# Altium PCB B45120517E.PcbDoc (part 1 of 2)
Units mil, origin at the board's own origin, x right, y up, seen from the top; angles counter-clockwise.
Board outline 4000 x 6000 mil, 2 copper layers (Top Layer, Bottom Layer); 156 components, 88 nets, 425 pads, 290 vias.
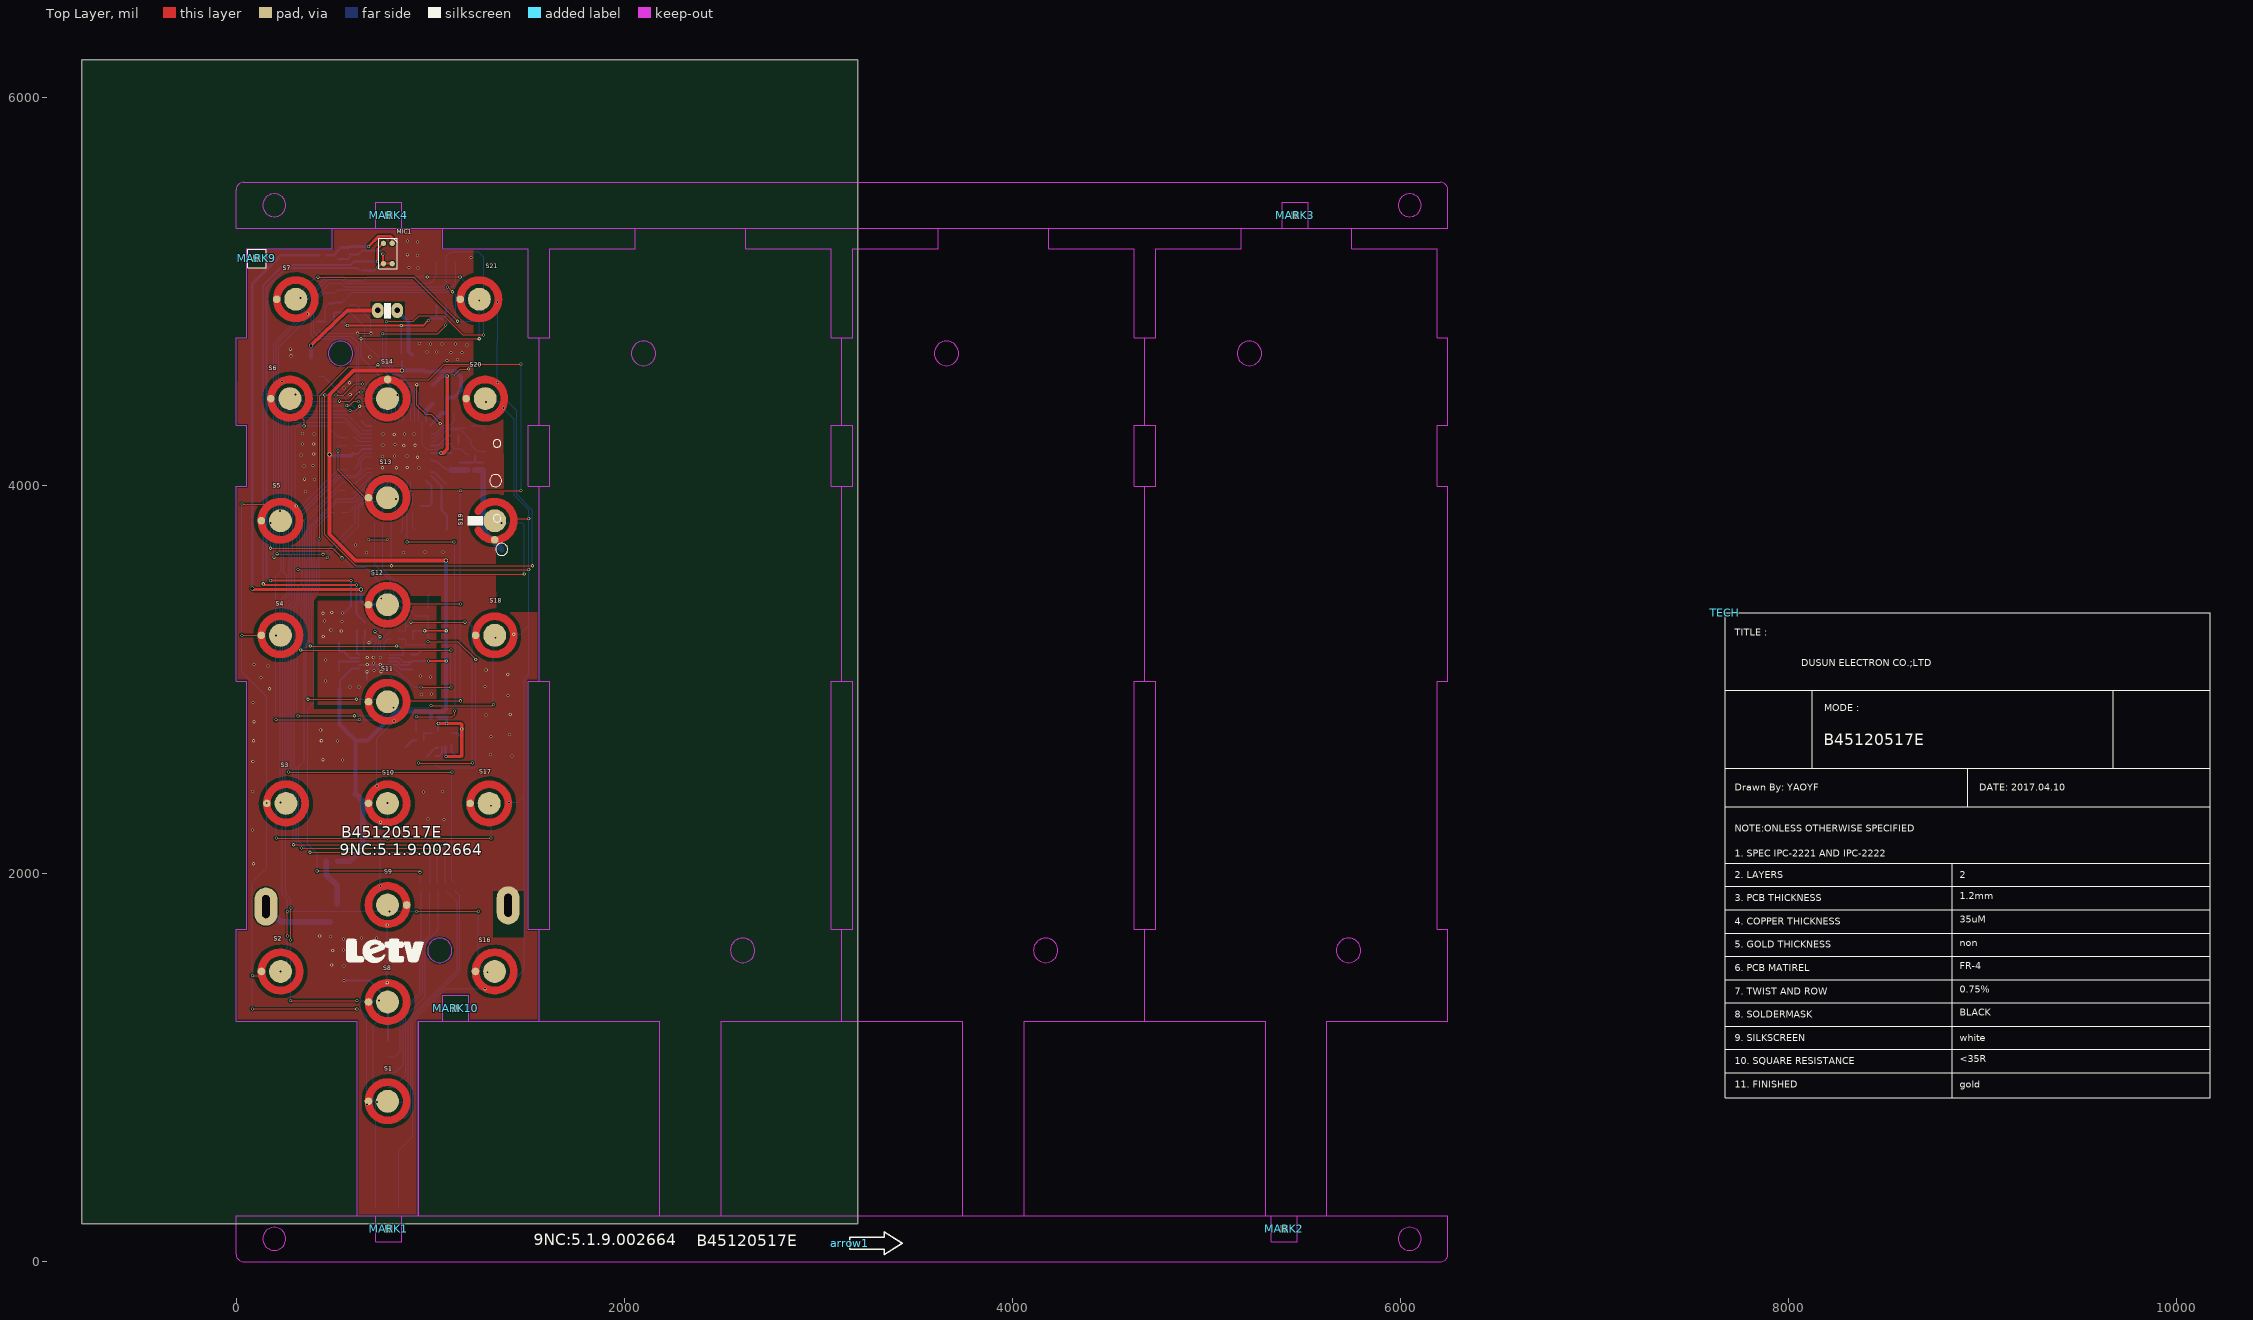
[diagram p0: Top Layer view]
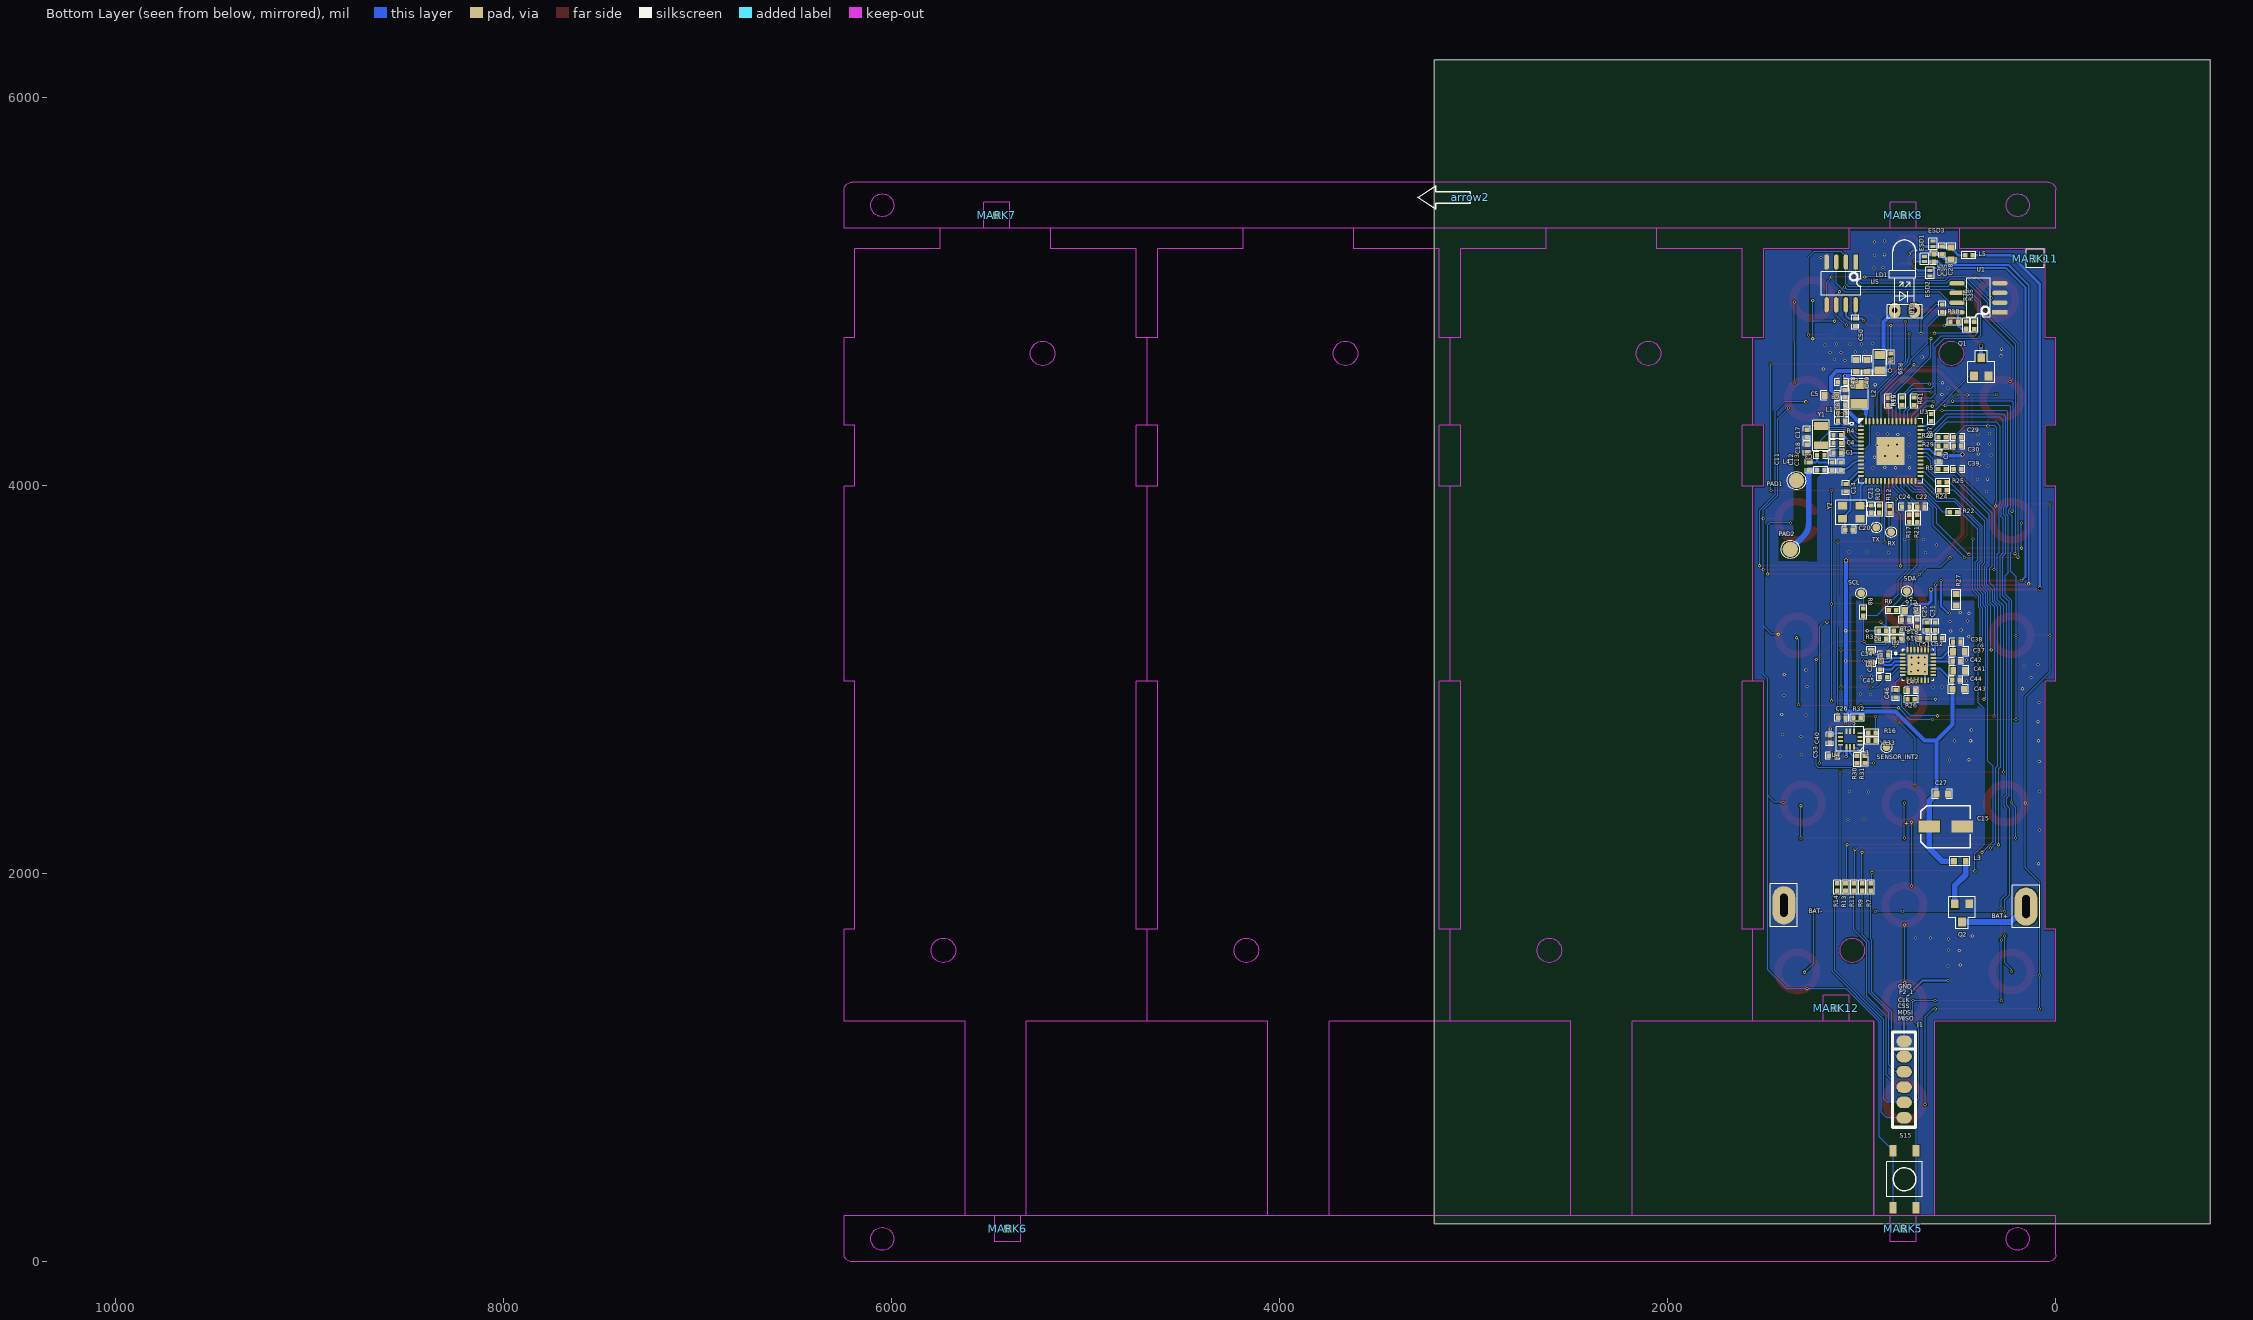
[diagram p1: Bottom Layer view, seen from below]

## Layer stack, top to bottom
Top Solder: solder mask 0.4, Solder Resist, Dk 3.5
Top Layer: signal copper 1.4
Dielectric1: core 12.6, FR-4, Dk 4.8
Bottom Layer: signal copper 1.4
Bottom Solder: solder mask 0.4, Solder Resist, Dk 3.5

## Board outline
3204.74,194.5 3204.74,6194.5 -795.26,6194.5 -795.26,194.5

## Design rules (kind name [scope] priority, off if disabled: settings)
Clearance [All] p1: gap=6 ignorepadtopadclearanceinfootprint=FALSE
ComponentClearance [All] p1: gap=0 collisioncheckmode=3 verticalgap=0 showdistances=FALSE
FabricationTestPointUsage TestPointUsage [All] p1: valid=0 allowmultiple=FALSE
FabricationTestpoint Testpoint [All] p1: side=3 testpointundercomponent=TRUE minsize=40 maxsize=100 preferedsize=60 minholesize=0 maxholesize=40 preferedholesize=32 testpointgrid=1 allowsidetop=TRUE allowsidebottom=TRUE usegrid=TRUE gridtolerance=0.01
HoleSize [All] p1: absolutevalues=TRUE maxlimit=500 minlimit=1 maxpercent=80.000 minpercent=20.000
HoleToHoleClearance [All] p1: gap=6 allowstackedmicrovias=TRUE
MinimumSolderMaskSliver [All] p1: minsoldermaskwidth=0
NetAntennae [All] p1: netantennaetolerance=10000
PolygonConnect [All] p1: connectstyle=Direct reliefconductorwidth=10 reliefentries=4 polygonreliefangle="90 Angle" airgapwidth=10
RoutingVias [All] p1: holewidth=10 width=16 viastyle="Through Hole" minholewidth=10 minwidth=16 maxholewidth=16 maxwidth=100
ShortCircuit [All] p1: allowed=TRUE
SilkToSilkClearance [All] p1: silktosilkclearance=0
SilkToSolderMaskClearance SilkscreenOverComponentPads [IsPad] p1: minsilkscreentomaskgap=2 clearancetoexposedcopper=TRUE
SolderMaskExpansion [All] p1: expansion=4
Width [All] p1: maxlimit=100 minlimit=6 preferedwidth=6
20 further rules are at their usual default settings.

## Classes and differential pairs
component class DSR-0609-ES8218-0410: ANT1 BAT+ BAT- C0 C1 C2 C3 C4 C5 C6 C7 C8 C9 C10 C11 C12 C13 C14 C15 C16 C17 C18 C19 C20 C21 C22 C24 C25 C26 C27 C28 C29 C30 C31 C32 C33 C34 C35 C36 C37 C38 C39 C40 C41 C42 C43 C44 C45 C46 C47 C48 C49 C51 C52 C53 ESD1 ESD2 ESD3 J1 L1 L2 L3 L4 L5 LD1 MIC1 PAD1 PAD2 Q1 Q2 R1 R2 R3 R4 R5 R6 R7 R8 R9 R10 R11 R12 R13 R14 R15 R16 R17 R18 R19 R20 R21 R22 R24 R25 R26 R27 R28 R29 R30 R31 R32 R33 R35 R36 R37 R38 R39 R40 R41 RX S1 S2 S3 S4 S5 S6 S7 S8 S9 S10 S11 S12 S13 S14 S15 S16 S17 S18 S19 S20 S21 SCL SDA SENSOR_INT2 TX U1 U2 U3 U5 Y1 Y2

## Components (designator, comment, footprint, x,y, rotation, side; value= is the part's Value field where it differs from the comment)
arrow1 "Comment" 1-ARROW 3163.19,95 r0 top
arrow2 "Comment" 1-ARROW 3018.19,5485 r0 bottom
BAT+ "TAP" BAT 153.65,1830.34 r270 bottom locked
BAT- "TAP" BAT 1402,1837 r270 bottom locked
C1 "0.47uF" C-0402 1127,4170 r0 bottom
C2 "2.2uF" C-0402 1105,4533 r0 bottom
C3 "0.15uF" C-0402 1212,4157 r0 bottom
C4 "0.47uF" C-0402 1127,4218 r0 bottom
C5 "10uF" C-0603 1162,4464 r0 bottom
C6 "2.2uF" C-0402 1087,4474 r90 bottom
C7 "33pF/NC" C-0402 1104,4333 r180 bottom
C8 "47nF" C-0402 1105,4416 r0 bottom
C9 "47nF" C-0402 603,4145 r270 bottom
C10 "1nF" C-0402 586,4914 r90 bottom
C11 "NC" C-0402 1272.81,4100 r90 bottom
C12 "NC" C-0402 1152,4100 r90 bottom
C13 "0.5pf" C-0402 1109,4100 r90 bottom
C14 "0.47uF" C-0402 1082,3989 r270 bottom
C15 "贴片铝电解电容100uF/10V,∮5*5.3,立隆,85C,VE" CAP_ALUM-C 568.19,2243 r180 bottom
C16 "10uF" C-0603 747,3357 r180 bottom
C17 "22pF" C-0402 1283,4269 r270 bottom
C18 "22pF" C-0402 1283,4192 r90 bottom
C19 "0.1uF" C-0402 775,3309 r180 bottom
C20 "15pF" C-0402 1066.19,3772 r180 bottom
C21 "8.2pF" C-0402 952,3879 r270 bottom
C22 "100pF/NC" C-0402 696,3890 r0 bottom
C24 "100pF/NC" C-0402 774,3891 r180 bottom
C25 "1uF" C-0402 665,3275 r270 bottom
C26 "0.1uF/50V/NC" C-0402 1103.19,2804 r0 bottom
C27 "0.1uF" C-0603 586,2411 r180 bottom
C28 "10uF/NC" C-0603 541,5197 r270 bottom
C29 "NC" C-0402 507,4249 r180 bottom
C30 "NC" C-0402 507,4205 r180 bottom
C31 "1uF" C-0402 622,3275 r270 bottom
C32 "10uF" C-0603 952,3118 r90 bottom
C33 "0.1uF" C-0402 906,3071 r270 bottom
C34 "30pF" C-0402 883,3129 r180 bottom
C35 "0.1uF" C-0402 587,5213 r270 bottom
C36 "15pF" C-0402 630,5173 r90 bottom
C37 "10uF" C-0603 500,3145 r180 bottom
C38 "0.1uF" C-0402 511,3195 r180 bottom
C39 "NC" c-0402 507,4084 r180 bottom
C40 "0.1uF/50V/NC" C-0402 1166,2694 r270 bottom
C41 "10uF" C-0603 499,3047 r180 bottom
C42 "0.1uF" C-0402 513,3096 r180 bottom
C43 "10uF" C-0603 503,2950 r180 bottom
C44 "0.1uF" C-0402 515,2999 r180 bottom
C45 "30pF" C-0402 888,3012 r0 bottom
C46 "30pF" C-0402 825,2927 r270 bottom
C47 "30pF" C-0402 745,2944 r180 bottom
C48 "10uF" C-0603 1029,4617 r90 bottom
C49 "1uF" C-0603 974,4617 r90 bottom
C50 "1uF/NC" C-0402 1033,4842 r270 bottom
C51 "12pF/NC" C-0402 683,3214 r180 bottom
C52 "12pF/NC" C-0402 604,3214 r180 bottom
C53 "0.1uF/50V/NC" C-0402 1151,2607 r0 bottom
ESD1 "PESD5V0F1BL/NC" SOD882 677,5168 r90 bottom
ESD2 "PESD5V0F1BL/NC" SOD882 649,5095 r270 bottom
ESD3 "PESD5V0F1BL/NC" SOD882 633,5246 r90 bottom
J1 "HEADER-6" PH-1*6-2.0 782,939.37 r270 bottom
L1 "MMZ1005Y152C" R-0402 1104,4374 r0 bottom
L2 "4.7uH" R-1008 1015,4472 r90 bottom
L3 "BLM18AG601SN1D" R-0603 495,2064 r180 bottom
L4 "0R" R-0402 1212,4080 r180 bottom
L5 "BLM15HG102SN1D" R-0402 448,5187 r0 bottom
LD1 "LR" IR-4.2-3 780,4903 r180 bottom locked
MARK1 "MARK" MARK-3.0#1 787.4,169.33 r90 top (schematic designator MARK4)
MARK2 "MARK" MARK-3.0#1 5402.83,169.09 r90 top (schematic designator MARK4)
MARK3 "MARK" MARK-3.0#1 5457.95,5393.66 r270 top (schematic designator MARK4)
MARK4 "MARK" MARK-3.0#1 787.4,5393.66 r270 top
MARK5 "MARK" MARK-3.0#2 787.4,169.33 r180 bottom (schematic designator MARK4)
MARK6 "MARK" MARK-3.0#2 5402.83,169.09 r0 bottom (schematic designator MARK4)
MARK7 "MARK" MARK-3.0#2 5457.95,5393.66 r0 bottom (schematic designator MARK4)
MARK8 "MARK" MARK-3.0#2 787.4,5393.66 r180 bottom (schematic designator MARK4)
MARK9 "Comment" Mark-2.0-TOP 107,5171 r180 top
MARK10 "MARK" MARK-3.0#1 1132.24,1307.09 r180 top (schematic designator MARK4)
MARK11 "Comment" Mark-2.0-TOP 106,5170 r0 bottom
MARK12 "MARK" MARK-3.0#2 1132,1307 r90 bottom (schematic designator MARK4)
MIC1 "MSM42A3722H8" MSM42A3722H8 782,5196 r0 top
PAD1 "TAP" TS-1.0#1 1337.35,4025.6 r180 bottom locked
PAD2 "TAP" TS-1.0#1 1368.79,3671.31 r180 bottom
Q1 "S8050LT1" SOT-23#1 385,4612 r90 bottom
Q2 "DMP2305U" SOT-23#2 484,1798 r270 bottom
R1 "2R" R-0805 908,4633 r270 bottom
R2 "1.5K" R-0402 894,3252 r180 bottom
R3 "1.5K" R-0402 894,3211 r180 bottom
R4 "0R" R-0402 1127,4259 r180 bottom
R5 "100R" R-0402 587,4084 r180 bottom
R6 "33R" R-0402 842,3357 r0 bottom
R7 "33R" R-0402 955,1931 r90 bottom
R8 "33R" R-0402 993,3348 r270 bottom
R9 "33R" R-0402 998,1931 r90 bottom
R10 "33R" R-0402 911,3879 r270 bottom
R11 "33R" R-0402 1041,1931 r90 bottom
R12 "33R" R-0402 857,3876 r270 bottom
R13 "33R" R-0402 1084,1931 r90 bottom
R14 "33R" R-0402 1127,1931 r90 bottom
R15 "47K" R-0402 863,4434 r90 bottom
R16 "0R/NC" R-0402 948,2727 r0 bottom
R17 "33R" R-0402 756,3831 r90 bottom
R18 "100R" R-0402 817,3252 r0 bottom
R19 "100R" R-0402 817,3211 r0 bottom
R20 "10k" R-0402 715,3291 r90 bottom
R21 "33R" R-0402 715,3831 r90 bottom
R22 "33R" R-0402 528,3863 r0 bottom
R24 "33R" R-0402 582,3976 r0 bottom
R25 "33R" R-0402 582,4017 r0 bottom
R26 "33R" R-0402 746,2899 r180 bottom
R27 "0R" R-0603 514,3412 r90 bottom
R28 "100R" R-0402 586,4250 r180 bottom
R29 "100R" R-0402 586,4205 r180 bottom
R30 "33R/NC" R-0402 1025,2588 r270 bottom
R31 "33R/NC" R-0402 984,2589 r270 bottom
R32 "0R/NC" R-0402 1024.19,2804 r180 bottom
R33 "33R/NC" R-0402 948,2686 r0 bottom
R35 "0R/NC" R-0402 420,4826 r90 bottom
R36 "0R" R-0402 462,4827 r90 bottom
R37 "1K" R-0402 643,4350 r270 bottom
R38 "0R/NC" R-0402 524,4844 r0 bottom
R39 "NC" R-0402 851,4662 r270 bottom
R40 "0R/NC" R-0402 793,4435 r90 bottom
R41 "0R/NC" R-0402 731,4435 r90 bottom
RX "TAP" TS-1.0#2 849,3760 r0 bottom
S1 "SW-PB" "K MAT D5"#1 780.79,826.77 r0 top
S2 "SW-PB" "K MAT D5"#2 229,1496.06 r0 top locked
S3 "SW-PB" "K MAT D5"#1 257.04,2362.2 r0 top locked
S4 "SW-PB" "K MAT D5"#1 228.41,3228.35 r0 top locked
S5 "SW-PB" "K MAT D5"#1 228.41,3818.9 r0 top locked
S6 "SW-PB" "K MAT D5"#3 277.3,4448.32 r0 top locked
S7 "SW-PB" "K MAT D5"#1 307.74,4960.63 r0 top locked
S8 "SW-PB" "K MAT D5"#1 780.66,1338.58 r0 top
S9 "SW-PB" "K MAT D5"#1 780.66,1838.58 r180 top
S10 "SW-PB" "K MAT D5"#1 780.66,2362.2 r0 top
S11 "SW-PB" "K MAT D5"#3 780.66,2885.83 r0 top
S12 "SW-PB" "K MAT D5"#1 780.66,3386.11 r0 top
S13 "SW-PB" "K MAT D5"#3 780.66,3937.29 r0 top locked
S14 "SW-PB" "K MAT D5"#3 780.66,4448.32 r270 top
S15 "SW-PB" KG4.5*4.5-SMD-1 780,425 r90 bottom
S16 "SW-PB" "K MAT D5"#1 1332.32,1496.06 r0 top locked
S17 "SW-PB" "K MAT D5"#1 1304.28,2362.2 r0 top locked
S18 "SW-PB" "K MAT D5"#1 1332.91,3228.35 r0 top locked
S19 "SW-PB" "K MAT D5"#4 1332.91,3818.9 r90 top
S20 "SW-PB" "K MAT D5"#1 1284.01,4448.32 r0 top locked
S21 "SW-PB" "K MAT D5"#1 1253.58,4960.63 r0 top locked
SCL "TAP" TS-1.0#2 1004,3445 r270 bottom
SDA "TAP" TS-1.0#2 768,3456 r270 bottom
SENSOR_INT2 "13" TS-1.0#2 873,2651 r180 bottom
TECH "Comment" "PCB technical" 7674.19,3344 r0 top
TX "TAP" TS-1.0#2 926,3784 r0 bottom
U1 "FM24C1024A" SOP08-6.0-1.27 399,4968 r90 bottom
U2 "ES8218" QFN-28-4*4-1 711,3076 r270 bottom
U3 "CSR1011" QFN-56-8*8 851.45,4177.17 r270 bottom
U4 "BMI160/NC" LGA-14 1060.19,2694 r0 bottom
U5 "AT25F1024B/NC" SOP08-6.0-1.27 1107,5042 r0 bottom
Y1 "32.768KHz,12.5pF" 32.768Khz-3215 1211,4258 r270 bottom
Y2 "16MHz,9pF" XD3225-1-12M-125M 1055,3862 r180 bottom

## Footprints (in the part's own frame and the unit in brackets; to place one, negate y for a bottom-side part, rotate by r counter-clockwise, add the part's x,y. Pads: shape width x height; smd on the part's side, far side on the other; paste and mask are expansions set on the pad)
1-ARROW [mil]
  silkscreen extent 0,-60 270,60
32.768Khz-3215 [mm]
  rect 1x1.8 smd: 1(-1.25,0) 2(1.25,0)
  silkscreen extent -2,-1.1 2,1.1
BAT [mm]
  oval 5x3 hole 1 slot 3 at 0 deg: 1(0,0)
  silkscreen extent -2.79,-1.78 2.79,1.78
C-0402 [mil]
  rect 22x24 smd: 1(-19,0) 2(19,0)
  silkscreen extent -36,-18 36,18
c-0402 [mil]
  rect 22x24 smd: 1(-19,0) 2(19,0)
  silkscreen extent -36,-18 36,18
C-0603 [mil]
  rect 30x35 smd: 1(-30,0) 2(30,0)
  silkscreen extent -51,-24 51,24
CAP_ALUM-C [mm]
  rect 2.8x1.6 smd: 1(-2.15,0) 2(2.15,0)
  silkscreen extent -3.25,-2.75 3.25,2.75
IR-4.2-3 [mm]
  oval 1.524x2 hole 0.7: 1(-1.27,0) 2(1.27,0)
  silkscreen extent -2.27,-1.04 2.29,9.22
"K MAT D5"#1 [mm]
  round 3 smd: 1(0,0)
  round 1 smd: 2(-2.5,0)
  Top Layer lines w1: -2.5,0 cw(c0,0) 2.5,0 cw(c0,0) -2.5,0
"K MAT D5"#2 [mm]
  round 3 smd: 1(0,0)
  round 1 smd: 2(-2.5,0)
  Top Layer lines w1: -2.5,0 ccw(c0,0) -2.427,-0.602 ccw(c0,0) 2.489,-0.236 ccw(c0,0) 2.5,0 ccw(c0,0) 2.489,0.236 ccw(c0,0) -2.5,0
"K MAT D5"#3 [mm]
  round 3 smd: 1(0,0)
  round 1 smd: 2(-2.5,0)
  Top Layer lines w1: -2.5,0 ccw(c0,0) 1.205,-2.19 ccw(c0,0) 2.5,0 ccw(c0,0) -2.5,0
"K MAT D5"#4 [mm]
  round 3 smd: 1(0,0)
  round 1 smd: 2(-2.5,0)
  Top Layer lines w1: -1.25,2.165 ccw(c0,0) -1.007,-2.288 ccw(c0,0) -0.78,-2.375 ccw(c0,0) 0.342,-2.476 ccw(c0,0) 1.25,2.165
KG4.5*4.5-SMD-1 [mm]
  rect 1.5x0.9 smd: 1(-3.75,-1.5) 1(3.75,-1.5) 2(-3.75,1.5) 2(3.75,1.5)
  silkscreen extent -2.3,-2.3 2.3,2.3
LGA-14 [mm]
  rect 0.675x0.25 smd: 1(-1.263,0.75) 2(-1.263,0.25) 3(-1.263,-0.25) 4(-1.263,-0.75) 8(1.263,-0.75) 9(1.263,-0.25) 10(1.263,0.25) 11(1.263,0.75)
  rect 0.25x0.675 smd: 5(-0.5,-1.013) 6(0,-1.013) 7(0.5,-1.013) 12(0.5,1.013) 13(0,1.013) 14(-0.5,1.013)
  silkscreen extent -1.8,-1.6 1.8,1.6
Mark-2.0-TOP [mm]
  rect 1x1 smd mask+0.5: 1(0,0)
  Top Layer pour cut-out: -1.2,1.2 -1.2,-1.2 1.2,-1.2 1.2,1.2
  Top Overlay keep-out lines w0.127: 1.2,1.2 -1.2,1.2 -1.2,-1.2 1.2,-1.2 1.2,1.2
  silkscreen extent -1.2,-1.2 1.2,1.2
MARK-3.0#1 [mm]
  rect 1x1 smd: 1(0,0)
  rect 2.5x2.5 on Top Solder: 4(0,0)
  Keep-Out Layer lines w0.127: -1.7,1.7 1.7,1.7 1.7,-1.7 -1.7,-1.7 -1.7,1.7
MARK-3.0#2 [mm]
  rect 1x1 smd: 1(0,0)
  rect 2.5x2.5 on Bottom Solder: 4(0,0)
  Keep-Out Layer lines w0.127: 1.7,-1.7 1.7,1.7 -1.7,1.7 -1.7,-1.7 1.7,-1.7
MSM42A3722H8 [mm]
  round 0.7 smd: 1(0.575,1.33) 2(0.575,-1.33) 3(-0.575,-1.33) 4(-0.575,1.33)
  silkscreen extent -1.2,-2 1.2,2
"PCB technical" [mil]
  silkscreen extent 0,-2500 2500,0
PH-1*6-2.0 [mm]
  oval 1.524x2 smd: 1(-5,0) 2(-3,0) 3(-1,0) 4(1,0) 5(3,0) 6(5,0)
  silkscreen extent -6.21,-1.5 6.26,1.5
QFN-28-4*4-1 [mm]
  rect 0.25x0.7 smd: 1(-1.35,-2) 2(-0.9,-2) 3(-0.45,-2) 4(0,-2) 5(0.45,-2) 6(0.9,-2) 7(1.35,-2) 15(1.35,2) 16(0.9,2) 17(0.45,2) 18(0,2) 19(-0.45,2) 20(-0.9,2) 21(-1.35,2)
  rect 0.7x0.25 smd: 8(2,-1.35) 9(2,-0.9) 10(2,-0.45) 11(2,0) 12(2,0.45) 13(2,0.9) 14(2,1.35) 22(-2,1.35) 23(-2,0.9) 24(-2,0.45) 25(-2,0) 26(-2,-0.45) 27(-2,-0.9) 28(-2,-1.35)
  rect 2.7x2.7 smd: 29(0,0)
  silkscreen extent -2.05,-3.03 2.05,2.05
QFN-56-8*8 [mm]
  rect 0.4x0.15 on Bottom Overlay: 0(-4.597,-2.743) 0(-4.597,-0.254) 0(-4.597,2.26) 0(4.598,-3.251) 0(4.598,-0.737) 0(4.598,1.752)
  rect 0.15x0.4 on Bottom Overlay: 0(-2.285,4.623) 0(-1.269,-4.623) 0(0.229,4.623) 0(1.22,-4.623) 0(2.719,4.623)
  rect 3.67x3.67 smd: 0(-0.025,0)
  oval 0.25x0.8 smd: 1(-3.275,-3.9) 2(-2.775,-3.9) 3(-2.275,-3.9) 4(-1.775,-3.9) 5(-1.275,-3.9) 6(-0.775,-3.9) 7(-0.275,-3.9) 8(0.225,-3.9) 9(0.725,-3.9) 10(1.22,-3.886) 11(1.725,-3.9) 12(2.225,-3.9) 13(2.725,-3.9) 14(3.225,-3.9) 29(3.225,3.9) 30(2.725,3.9) 31(2.225,3.9) 32(1.725,3.9) 33(1.225,3.9) 34(0.725,3.9) 35(0.225,3.9) 36(-0.275,3.9) 37(-0.775,3.9) 38(-1.275,3.9) 39(-1.775,3.9) 40(-2.275,3.9) 41(-2.775,3.9) 42(-3.275,3.9)
  oval 0.8x0.25 smd: 15(3.875,-3.25) 16(3.875,-2.75) 17(3.875,-2.25) 18(3.875,-1.75) 19(3.875,-1.25) 20(3.875,-0.75) 21(3.875,-0.25) 22(3.875,0.25) 23(3.875,0.75) 24(3.875,1.25) 25(3.875,1.75) 26(3.875,2.25) 27(3.875,2.75) 28(3.875,3.25) 43(-3.925,3.25) 44(-3.925,2.75) 45(-3.925,2.25) 46(-3.925,1.75) 47(-3.925,1.25) 48(-3.925,0.75) 49(-3.925,0.25) 50(-3.925,-0.25) 51(-3.925,-0.75) 52(-3.925,-1.25) 53(-3.925,-1.75) 54(-3.925,-2.25) 55(-3.925,-2.75) 56(-3.925,-3.25)
  silkscreen extent -4.3,-5.34 4.19,4.19
R-0402 [mil]
  rect 22x24 smd: 1(-19,0) 2(19,0)
  silkscreen extent -36,-18 36,18
R-0603 [mil]
  rect 30x35 smd: 1(-30,0) 2(30,0)
  silkscreen extent -51,-24 51,24
R-0805 [mil]
  rect 40x56 smd: 1(-40,0) 2(40,0)
  silkscreen extent -66,-34 66,34
R-1008 [mm]
  rect 1.2x2.2 smd: 1(-1.25,0) 2(1.25,0)
  silkscreen extent -2.01,-1.24 2,1.24
SOD882 [mm]
  rect 0.4x0.7 smd: 1(-0.35,0) 2(0.35,0)
  silkscreen extent -0.75,-0.55 0.75,0.55
SOP08-6.0-1.27 [mm]
  rect 0.6x2 smd: 1(-1.905,-2.8)
  oval 0.6x2 smd: 2(-0.635,-2.8) 3(0.635,-2.8) 4(1.905,-2.8) 5(1.905,2.8) 6(0.635,2.8) 7(-0.635,2.8) 8(-1.905,2.8)
  silkscreen extent -2.54,-1.53 2.57,1.52
SOT-23#1 [mil]
  rect 45x40 smd: 1(-47.24,37.4) 2(-47.24,-37.4) 3(47.24,0)
  silkscreen extent -83,-69 83,69
SOT-23#2 [mil]
  rect 45x40 smd: 1(-47.24,-37.4) 2(-47.24,37.4) 3(47.24,0)
  silkscreen extent -83,-69 83,69
TS-1.0#1 [mm]
  round 2 smd: 1(0,0)
  silkscreen extent -1.2,-1.2 1.2,1.2
TS-1.0#2 [mm]
  round 1 smd: 1(0,0)
  silkscreen extent -0.7,-0.7 0.7,0.7
XD3225-1-12M-125M [mm]
  rect 1.2x1 smd: 1(-1.15,-0.85) 2(1.15,0.85) 3(-1.15,0.85) 3(1.15,-0.85)
  silkscreen extent -2.04,-1.6 2.02,1.6

## Part data
C1 C2 C3 C4 C5 C6 C7 C8 C9 C10 C11 C12 C13 C14 C16 C17 C18 C19 C20 C21 C25 C28 C29 C30 C31 C32 C33 C34 C35 C36 C37 C38 C39 C41 C42 C43 C44 C45 C46 C47 C48 C49 C50 C51 C52: library part CAP, "Capacitor"
C15 C27: library part C_Dup1
C22 C24: library part CAP
C26 C40 C53: library part Cap, "capacitor 27 pF NPO , +/- 2 %, SMD case 0603"
ESD1 ESD2 ESD3: library part ESD
J1: library part HEADER-5
L1 L5: library part "INDUCTOR IRON"
L2 L4: library part INDUCTOR
L3: library part Inductance
LD1: library part LED
Q1: library part NPN, "NPN型晶体管"
Q2: library part "MOSFET P"
R1 R2 R3 R4 R5 R6 R7 R8 R9 R10 R11 R12 R13 R14 R15 R16 R18 R19 R20 R22 R24 R25 R26 R27 R28 R29 R30 R31 R32 R33: library part RES1
R17 R21 R35 R36 R37 R38 R39 R40 R41: library part RES
SENSOR_INT2: library part TESTPOINT
U1: library part AT24C512
U3: library part CSR1001
U4: library part BMI160
U5: library part AT25F512B
Y1: library part CRYSTAL
Y2: library part CRYSTAL4

## Free pads (board coordinates)
  round 59.06 on Bottom Solder: 0(1340.98,3932.01)

## Via types
v1: diameter 16, hole 10, Top Layer to Bottom Layer, tented both sides, 284 vias
v2: diameter 20, hole 16, Top Layer to Bottom Layer, tented both sides, 6 vias

## Nets (pads, with @x,y where several pads share a name; then routed paths per layer and width w, separated by ;. In a path a pad name is that pad's centre, name@x,y a point inside that pad or via, vN(x,y) a via of type N, cw(c..) or ccw(c..) an arc to the next point about the centre after c; other vN are vias at no path point)
9867_BCLK: R24.2 U3.29 | length 131
  Bottom Layer w6: R24.2@601,3968 615.71,3968 U3.29@697.91,4050.2
9867_LRCLK: R25.2 U3.30 | length 121.3
  Bottom Layer w6: R25.2@601,4011 617,4011 675.89,4069.89 U3.30@697.91,4069.89
9867_MCLK: R22.2 U3.26 | length 291.3
  Bottom Layer w6: R22.2@547,3863 580,3863 601,3884 601,3886.73 692.93,3978.66 728.66,3978.66 762.87,4012.87 U3.26@762.87,4024.61
9867_SCL: R3.2 R8.2 R17.1 R19.2 R30.2 | length 1999.7
  Top Layer w6: v1(990,3196) 1143,3196 v1(1235,3104)
  Bottom Layer w6: R17.1@756,3812 756,3568 813,3511 813,3440.14 875.14,3378 875.73,3378 881,3372.73 881,3372.14 924.14,3329 R8.2@993,3329 990,3326 990,3195 976,3181 875,3181 R3.2@875,3211 R19.2@836,3211 ; R30.2@1025,2569 1047,2547 1224,2547 1235,2558 v1(1235,3104)
9867_SDA: R2.2 R6.2 R18.2 R21.1 R31.2 | length 2053.7
  Top Layer w6: v1(902,3296) v1(1179,3296) ; v1(941,2570) v1(1218,2570)
  Bottom Layer w6: R21.1@715,3812 715,3591 797,3509 797,3421 R6.2@861,3357 875,3343 875,3269 ; R18.2@836,3252 R2.2@875,3252 875,3269 ; v1(902,3296) 875,3269 ; v1(941,2570) R31.2@984,2570 ; v1(1179,3296) 1198,3296 1218,3276 v1(1218,2570)
9867_SDOUT: R26.2 U3.27 | length 1727.1
  Top Layer w6: v1(371,2899) v1(621,2899)
  Bottom Layer w6: v1(371,2899) 362,2908 362,3370.18 374,3382.18 374,3440.12 403.93,3470.05 403.93,3599.7 390.62,3613.01 390.62,3785.62 521,3916 613.3,3916 690.3,3993 722.4,3993 743.19,4013.79 U3.27@743.19,4024.61 ; v1(621,2899) R26.2@727,2899
AGND: C16.2 C19.2 C28.2 C31.1 C32.2 C33.2 C34.1 C35.2 C36.2 C37.2 C38.2 C41.2 C42.2 C43.2 C44.2 C45.2 C46.2 C47.2 C51.1 C52.2 ESD2.1 MIC1.2 MIC1.3 R20.2 R27.1 U2.4 U2.6 U2.13 U2.18 U2.29 | length 3698.6
  Top Layer w10: v1(177,3510) v1(592,3510) ; v1(732,5127) 748.64,5143.64 MIC1.3@759.36,5143.64 ; v1(756,5194) 756,5147 MIC1.3@759.36,5143.64 ; MIC1.2@804.64,5143.64 MIC1.3@759.36,5143.64
  Bottom Layer w10: v1(177,3510) 157,3530 157,5022 256,5121 628,5121 ESD2.1@639,5110 ; C28.2@525,5167 C28.2@541,5167 575,5167 587,5179 C35.2@587,5194 589,5192 C36.2@630,5192 649,5211 739,5211 v1(756,5194) ; v1(549,3344) 558,3344 592,3378 v1(592,3510) ; U2.18@632.26,3076 U2.29@709,3076 ; ESD2.1@648.78,5109 ESD2.1@649,5108.78 713.78,5108.78 v1(732,5127) ; U2.13@675.57,2997.26 v1(675.57,3040.57) U2.29@711,3076 ; v1(684,3190) 702,3208 C51.1@702,3214 ; U2.6@789.74,3040.57 v1(746.43,3040.57) U2.29@711,3076 ; C34.1@902,3129 933,3129 C32.2@952,3148 ; C33.2@906,3052 849.37,3052 825.37,3076 U2.4@789.74,3076 U2.29@711,3076
  other v1: 955,2924 1007,2925 587,2963 633,2963 461,2992 1002,3014 951,3019 711,3047 743,3078 676,3079 709,3085 461,3101 676,3114 707,3114 744,3114 449,3223 542,3250 488,3255 545,3300 456,3302 448,3342 493,3346
C0: R28.1 U3.38 | length 102.3
  Bottom Layer w6: R28.1@605,4250 612,4250 634.63,4227.37 U3.38@697.91,4227.37
C1: R29.1 U3.37 | length 94
  Bottom Layer w6: R29.1@605,4205 607.69,4207.69 U3.37@697.91,4207.69
C2: R5.1 U3.35 | length 142.1
  Bottom Layer w6: R5.1@606,4084 633,4111 633,4137 664.32,4168.32 U3.35@697.91,4168.32
GND: BAT-.1 C1.2 C2.2 C3.2 C4.2 C5.2 C6.2 C7.2 C8.2 C9.2 C10.2 C11.2 C12.2 C13.2 C14.2 C15.2 C17.2 C18.2 C20.2 C21.2 C22.1 C24.1 C26.2 C27.2 C29.2 C30.2 C39.2 C40.2 C48.2 C49.2 C50.2 C53.2 ESD1.2 ESD2.2 ESD3.2 J1.1 PAD1.1 Q1.2 Q2.2 R4.1 R15.2 R27.2 R35.1 U1.1 U1.2 U1.3 U1.4 U3.0@851.46,4178.16 U3.9 U3.11 U3.12 U4.1 U4.6 U4.7 U5.4 Y2.3 | length 1636.3
  Top Layer w6: v1(626,4785) v1(695,4785) ; v1(682,3722) v1(781,3722) ; v1@932,4520 932,4414 979,4367 1005,4367 v1(1052,4320) ; v1(1118,4564) 1154,4600 v1(1199,4600)
  Bottom Layer w6: R35.1@420,4807 442,4785 v1(626,4785) ; C10.2@586,4933 618,4933 695,4856 v1(695,4785)
  Bottom Layer w10: v1(557,1450) 685,1450 782,1353 J1.1@782,1136.22 ; C4.2@1146,4218 R4.1@1146,4259 ; C12.2@1152,4119 1223,4119 1231,4127 ; C3.2@1231,4157 1231,4127 ; C11.2@1272.81,4119 1239,4119 1231,4127
  other v1: 557,1524 493,1530 498,1603 553,1606 554,1663 646,1668 724,1668 486,1676 431,1679 90,2051 85,2225 1071,2279 990,2282 965,2420 85,2423 1064,2424 86,2578 549,2585 448,2587 1421,2606 1312,2614 522,2683 89,2685 439,2685 1314,2707 1409,2717 436,2740 93,2783 1287,2818 1413,2821 88,2882 1401,2918 172,2953 1283,2965 128,3010 1400,3026 1289,3050 164,3071 93,3078 672,3655 862,3656 974,3657 1067,3657 615,3694 358,3969 403,4031 353,4033 943,4090 754,4092 826,4092 882,4093 349,4101 396,4103 935,4146 755,4151 816,4152 881,4152 334,4158 400,4163 864,4207 921,4208 757,4210 818,4212 343,4214 400,4215 815,4263 402,4265 868,4265 757,4266 917,4266 342,4268 588,4469 557,4504 931,4520 584,4530 1087,4645 1142,4650 689,4662 282,4669 1107,4686 1164,4686 984,4688 1033,4688 280,4703 1190,4725 1131,4729 1002,4730 1062,4730 946,4733 937,5121 891,5125 1211,5175 935,5186 883,5190 935,5256 883,5261
L0: S1.1 S8.1 S15.1 U3.40 | length 5053.7
  Top Layer w6: v1(281,1346) v1(623,1346) ; v1(281,1658) 281,1821 v1(282,1822)
  Bottom Layer w6: v1(281,1346) v1(281,1658) ; v1(282,1822) 282,1867 255,1894 255,2335 266.69,2346.69 266.69,2396.45 252.69,2410.45 252.69,3388.69 287,3423 287,3639.14 272,3654.14 272,3831 280.69,3839.69 280.69,3895.31 272,3904 272,4334 290,4352 558,4352 643.26,4266.74 U3.40@697.91,4266.74 ; v1(623,1346) v1(736,1346) 739,1343 739,1246 708,1215 708,840.63 v1(725.82,822.82) 720.94,817.95 S15.1@720.94,572.64 S15.1@720.94,277.36
L1: S2.1 S9.1 S16.1 U3.41 | length 4722.7
  Top Layer w6: v1(264,1679) v1(264,1805) ; v1(930,1805) v1(1249,1805)
  Bottom Layer w6: v1(228,1496) 228,1505 264,1541 v1(264,1679) ; U3.41@697.91,4286.43 651.57,4286.43 570,4368 271,4368 259,4356 259,3898 268,3889 268,3848.76 258,3838.76 258,3651 274,3635 274,3435 240,3401 240,2405 254,2391 254,2352 237,2335 237,1892 264,1865 v1(264,1805) v1(791,1805) v1(930,1805) ; v1(1249,1805) 1249,1539 v1(1296,1492)
L2: S3.1 S10.1 S17.1 U3.43 | length 4221.7
  Top Layer w6: v1(208,2183) v1(1314,2183) ; v1(586,4387) 617,4387 v1@637,4407
  Bottom Layer w6: v1(208,2183) 208,2340 228,2360 v1(228,2366) 228,3406 262,3440 262,3536 246,3552 246,3842 255.69,3851.69 255.69,3885.31 247,3894 247,4381 253,4387 v1(586,4387) ; v1(637,4409) 668,4409 723.5,4353.5 U3.43@723.5,4331.7 ; v1(781,2183) v1(781,2365) ; v1(1314,2183) v1(1314,2350)
L3: S4.1 S11.1 S18.1 U3.44 | length 3719.6
  Top Layer w6: v1(205,2794) v1(635,2794) ; v1(570,4412) 584,4412 606,4434 v1(631,4434) ; v1(1005,2866) 1321,2866 v1(1326,2871)
  Bottom Layer w6: v1(205,2794) v1(205,3227) 205,3531 233,3559 233,3653 226,3660 226,3841 243,3858 243,3875 233,3885 233,4405.76 239.24,4412 v1(570,4412) ; v1(631,4434) 668,4434 743.19,4358.81 U3.44@743.19,4331.7 ; v1(635,2794) 750,2794 v1(811,2855) 994,2855 v1(1005,2866) ; v1(1326,2871) 1326,3206 v1(1336,3216)
L4: S5.1 S12.1 S19.1 U3.46 | length 3287.7
  Top Layer w6: v1(178,3677) 497,3677 v1(546,3628) ; v1(533,4435) 585,4435 633,4483 v1(643,4483) ; v1(702.16,3540.84) 705.31,3544 v1(1485,3544)
  Bottom Layer w6: v1(178,3677) v1(178,3808) ; v1(226,3868) 220,3874 220,4430 225,4435 v1(533,4435) ; v1(546,3628) 596,3578 665,3578 739.31,3503.69 739.31,3427.69 v1(748,3419) ; v1(643,4483) 736,4483 737,4484 753,4468 753,4411.97 782.56,4382.41 U3.46@782.56,4331.7 ; v1(1367,3808) 1475,3808 1485,3798 v1(1485,3544)
L5: S6.1 S13.1 S20.1 U3.48 | length 3912.2
  Top Layer w6: v1(457,4466) 457,3746.13 616.13,3587 v1(800,3587) v1(1527,3587) ; v1(514,4466) 553,4466 611,4524 v1(651,4524)
  Bottom Layer w6: v1(307,4470) 311,4466 v1(457,4466) v1(514,4466) ; v1(651,4524) 734.97,4524 784.97,4474 808.73,4474 814,4468.73 814,4430.73 821.93,4422.8 U3.48@821.93,4331.7 ; v1(800,3587) 800,3850 823,3873 v1(823,3930) ; v1(1289,4432) 1399,4432 1446,4385 1446,3955 1527,3874 v1(1527,3587)
L6: S7.1 S14.1 S21.1 U3.49 | length 2395.2
  Top Layer w6: v1(422,5074) 915,5074 v1(1142,4847) v1@1142.5,4846.5 ; v1(643,4757) v1(1253,4757)
  Bottom Layer w6: v1(332,4967) 337.13,4972.13 337.13,5004.13 407,5074 v1(422,5074) ; v1(643,4757) 645.25,4754.75 645.25,4662.75 831,4477 v1(831,4466) 831,4464 841.61,4453.39 U3.49@841.61,4331.7 ; v1(1142,4847) 1251,4847 1253,4845 ; v1(1253,4757) 1253,4845 ; v1(1253,4955) 1253,4845
LE_SPI_CLK: R9.2 U3.28 | length 2958.9
  Top Layer w6: v1(380.69,2110.45) v1(999.45,2110.45)
  Bottom Layer w6: v1(380.69,2110.45) 324,2167.14 324,2553 350,2579 350,3375.15 362,3387.15 362,3445.09 391.93,3475.02 391.93,3594.73 378.62,3608.04 378.62,3790.59 521.03,3933 605,3933 696.61,4024.61 U3.28@723.5,4024.61 ; R9.2@998,1950 999.45,1951.45 v1(999.45,2110.45)
LE_SPI_CSS: R11.2 U3.31 | length 3097.7
  Top Layer w6: v1(336.5,2131.5) 1030.5,2131.5 v1(1036,2126)
  Bottom Layer w6: v1(336.5,2131.5) 309.84,2158.16 309.84,2547.13 299.93,2557.04 299.93,3375.99 326,3402.06 326,3460 355.93,3489.93 355.93,3579.82 342.62,3593.13 342.62,3851.62 533,4042 621.97,4042 669.55,4089.57 U3.31@697.91,4089.57 ; v1(1036,2126) 1036,1955 R11.2@1041,1950
LE_SPI_MISO: R14.2 U3.39 | length 3677.6
  Top Layer w6: v1(270,2523) v1(1112,2523)
  Bottom Layer w6: v1(270,2523) 270,3380 302,3412 302,3647 292.69,3656.31 292.69,3903.31 286,3910 286,4307 305,4326 564.73,4326 643.67,4247.06 U3.39@697.91,4247.06 ; v1(1112,2523) 1112,1965 R14.2@1127,1950
LE_SPI_MOSI: R13.2 U3.34 | length 3243.3
  Top Layer w6: v1(295,2149) v1(1077,2149)
  Bottom Layer w6: v1@294.28,2149 294.28,2540.69 284.38,2550.59 284.38,3377.41 314,3407.03 314,3473 340.38,3499.38 340.38,3573.38 327.07,3586.69 327.07,3858.07 523,4054 617,4054 645,4082 645,4127 666.63,4148.63 U3.34@697.91,4148.63 ; v1(1077,2149) 1077,1957 R13.2@1084,1950
NetANT1_2: C11.1 L4.1 PAD2.1 | length 479.8
  Bottom Layer w30: L4.1@1231,4080 1232,4081 C11.1@1272.81,4081 ; C11.1@1274,4073.6 1274,3804 ccw(c1365.5,3804) 1300.8,3739.3 PAD2.1@1368.79,3671.31
NetBAT+_1: BAT+.1 Q2.3 | length 363.3
  Bottom Layer w30: BAT+.1@153.65,1830.34 233.24,1750.76 Q2.3@484,1750.76
NetC1_1: C1.1 C2.1 L2.2 U3.8 | length 642
  Top Layer w20: v1(1055,4169) 1069,4169 1088,4188 v1@1088,4562
  Bottom Layer w10: U3.8@1005,4168.32 1055.32,4168.32 1055,4168.63 v1(1055,4169) 1107,4169 C1.1@1108,4170
  Bottom Layer w20: L2.2@1015,4521.21 1018.34,4521.21 1061.13,4564 v1(1088,4564) 1088,4535 C2.1@1086,4533
NetC3_1: C3.1 C4.1 U3.7 U3.55 | length 409.8
  Bottom Layer w6: U3.55@959.72,4331.7 959.72,4211.28 983,4188 U3.7@1005,4188 1044.8,4188 1074.8,4218 C4.1@1108,4218 1108,4208 1127,4189 1158,4189 1185,4162 C3.1@1198,4162
NetC7_1: C7.1 L1.2 U3.3 | length 186.4
  Bottom Layer w6: U3.3@1005,4266.74 1026.77,4266.74 1071.03,4311 1101,4311 C7.1@1123,4333 L1.2@1123,4374
NetC10_1: C10.1 R36.1 R38.1 U1.8 U3.52 | length 891.9
  Bottom Layer w6: C10.1@586,4895 662,4819 662,4734.03 750.69,4645.34 750.69,4630.37 900.67,4480.39 U3.52@900.67,4331.7
  Bottom Layer w10: R36.1@462,4806 486,4806 505,4825 R38.1@505,4844 505,4888.76 U1.8@509.24,4893 584,4893 C10.1@586,4895
NetC12_1: C12.1 C13.1 L4.2 U3.10 | length 203
  Bottom Layer w10: U3.10@1004.46,4129.16 cw(c1004.46,4060.63) 1052.91,4109.09 1061.2,4100.8 ccw(c1109,4148.6) C13.1@1109,4081
  Bottom Layer w30: C13.1@1109,4081 C12.1@1152,4081 1153,4080 L4.2@1193,4080
NetC14_1: C14.1 U3.13 | length 102.6
  Bottom Layer w10: U3.13@1005,4069.89 1020.11,4069.89 C14.1@1082,4008
NetC16_1: C16.1 C19.1 L5.1 U2.25 | length 2995.9
  Top Layer w14: v2(83.43,3470) 89.43,3464 v2(644,3464)
  Bottom Layer w6: U2.25@711,3154.74 711,3177 722,3188 722,3223 794,3295 C19.1@794,3309 794,3340 C16.1@777,3357
  Bottom Layer w14: v2(83.43,3470) 83.43,5040.43 230,5187 L5.1@429,5187 ; v2(644,3464) 644,3404 659,3389 745,3389 C16.1@777,3357
NetC17_1: C17.1 U3.4 Y1.1 | length 276.5
  Bottom Layer w6: U3.4@1005,4247.06 1024.06,4247.06 1076,4299 Y1.1@1179.98,4299 ; Y1.1@1211,4307.21 1263.79,4307.21 C17.1@1283,4288
NetC18_1: C18.1 U3.5 Y1.2 | length 368.2
  Bottom Layer w6: U3.5@1005,4227.37 1026.37,4227.37 1086,4287 1159,4287 1211,4235 Y1.2@1211,4208.79 1241.79,4178 1283,4178 C18.1@1283,4173
NetC20_1: C20.1 U3.14 Y2.1 | length 312.9
  Bottom Layer w10: U3.14@1005,4050.2 1059,3996.2 1059,3992.44 1059.46,3991.98 1059.46,3986.02 1059,3985.56 1059,3954.44 1059.46,3953.98 1059.46,3873.54 1086.46,3846.54 1086.46,3773.28 C20.1@1085.19,3772
NetC21_1: C21.1 U3.15 Y2.2 | length 188.2
  Bottom Layer w10: C21.1@952,3896 Y2.2@995.38,3896 ; U3.15@979.41,4024.61 1006,3998.02 1006,3906.62 Y2.2@995.38,3896 ; Y2.2@995.91,3895.46 Y2.2@995.38,3896
NetC25_1: C25.1 C36.1 ESD1.1 MIC1.4 | length 2979.7
  Top Layer w10: v1(140,3494) 147,3487 v1(621,3487) v1@622,3487 ; v1(728,5155) 728,5217 MIC1.4@759.36,5248.36
  Bottom Layer w10: v1(140,3494) 140,5033 244,5137 589,5137 606,5154 C36.1@630,5154 676.78,5154 ESD1.1@677,5154.22 v1@728,5154.22 ; v1(621,3487) 621,3338 C25.1@665,3294
NetC25_2: C25.2 C51.2 U2.22 | length 104.2
  Bottom Layer w10: U2.22@657.85,3154.74 657.85,3207.85 C51.2@664,3214 665,3215 C25.2@665,3256
NetC28_1: C28.1 C35.1 ESD3.1 L5.2 MIC1.1 | length 393.5
  Top Layer w14: v1(683,5232) 682.44,5232 682.22,5232.22 735,5285 795,5285 804.64,5275.36 MIC1.1@804.64,5248.36 MIC1.1@805,5248
  Bottom Layer w14: L5.2@467,5187 501,5187 C28.1@528.27,5214.27 ; C28.1@541,5227 582,5227 C35.1@587,5232 587.22,5232.22 ESD3.1@633,5232.22 633.22,5232 v1(683,5232)
NetC29_1: C29.1 R28.2 S1.2 S2.2 S3.2 S4.2 S5.2 S6.2 S7.2 | length 5216.6
  Top Layer w6: v1(30,3228) S4.2@129.64,3228 ; v1(30,3905) 174,3905 ; v1(84,1303) v1(622,1303) ; v1(84,1475) 130.84,1475 133.47,1472.37 ; 324.75,4362.09 351,4335.84 v1(351,4308)
  Bottom Layer w6: v1(30,3905) v1(30,3228) 30,3041 158,2913 v1(158,2365) 158,2030 84,1956 v1(84,1475) v1(84,1303) ; v1(236,4536) 220,4552 220,4714 369,4863 v1(369,4884) ; v1(310,3894) 310,3915 305,3920 305,4297 316,4308 v1(351,4308) 467,4308 C29.1@526,4249 527,4250 R28.2@567,4250 ; v1(622,1303) 633,1303 674,1262 v1(674,810)
NetC30_1: C30.1 R29.2 S8.2 S9.2 S10.2 S11.2 S12.2 S13.2 S14.2 | length 4982.1
  Top Layer w6: v1(526,4179) 526,4078 666.71,3937.29 S13.2@682.23,3937.29 ; 815,4545 992,4545 1073,4626 v1(1469,4626) ; 879.08,3386.11 882.97,3390 v1(1156,3390) ; 879.08,3937.29 879.08,3974 v1(1157,3974) v1(1469,3974) ; 883,2891 v1(1156,2891)
  Bottom Layer w6: v1(526,4179) C30.1@526,4205 R29.2@567,4205 ; v1(726,2452) 726,2699 v1(814,2787) ; v1(744,1936) v1(744,2265) ; v1(779,1438) v1(779,1736) ; v1(1156,2891) v1(1156,3390) 1156,3973 v1(1157,3974) ; v1(1469,3974) v1(1469,4626)
NetC31_2: C31.2 C52.1 U2.21 | length 131.1
  Bottom Layer w10: C31.2@622,3256 622,3215 C52.1@623,3214 623,3138.41 U2.21@632.26,3129.15
NetC34_2: C34.2 R22.1 U2.1 | length 1367.8
  Top Layer w6: v1(382,3174) 379,3174 378,3173 v1(828,3173)
  Bottom Layer w6: v1(382,3174) 385,3174 377,3182 377,3368.21 386,3377.21 386,3435.15 415.93,3465.08 415.93,3604.67 402.62,3617.98 402.62,3775.62 490,3863 R22.1@509,3863 ; U2.1@789.74,3129.15 C34.2@863.85,3129.15 ; v1(828,3173) 842,3173 863,3152 863,3130 C34.2@863.85,3129.15 ; C34.2@864,3129 C34.2@863.85,3129.15
NetC37_1: C37.1 C38.1 U2.20 | length 166.2
  Bottom Layer w10: C38.1@530,3195 C37.1@530,3145 554,3145 587.57,3111.43 U2.20@632.26,3111.43
NetC39_1: C39.1 R5.2 S15.2 S16.2 S17.2 S18.2 S19.2 S20.2 S21.2 | length 7163.5
  Top Layer w6: v1(319,3567) v1(1508,3567) ; 1423,3779.26 1423,3784.77 1426.42,3788.19 ; 1430.41,3832.37 1432.04,3834 1436.04,3830 v1(1508,3830)
  Bottom Layer w6: v1@319,3566 314,3571 314,3872 C39.1@526,4084 R5.2@568,4084 ; S15.2@839.05,277.36 S15.2@839.06,572.64 911,644.58 911,1237 1081,1407 v1(1282,1407) 1386,1407 1485,1506 1485,2404 ; v1(1347,4532) v1(1348,4947) ; v1(1378,4399) 1434,4343 1434,3950.03 1508,3876.03 v1(1508,3830) v1(1508,3567) 1508,3277 ; v1(1407,2367) 1448,2367 1485,2404 ; v1(1431,3234) 1465,3234 1508,3277 ; 1485,2404 1485,3004 1508,3027 1508,3277
NetC41_1: C41.1 C42.1 U2.19 | length 151.4
  Bottom Layer w10: C41.1@529,3047 529,3093 C42.1@532,3096 534.28,3093.72 U2.19@632.26,3093.72
NetC45_1: C45.1 R24.1 U2.5 | length 2274.7
  Top Layer w6: v1(333,3152) v1(1107,3152) ; v1(953,2962) v1(1107,2962)
  Bottom Layer w6: v1@335,3149 335,3377.12 350,3392.12 350,3450.06 379.93,3479.99 379.93,3589.76 366.62,3603.07 366.62,3815.62 527,3976 R24.1@563,3976 ; U2.5@789.74,3058.28 815.72,3058.28 862,3012 C45.1@869,3012 919,2962 v1(953,2962) ; v1(1107,2962) v1(1107,3152)
NetC46_1: C46.1 R25.1 U2.7 | length 2015.4
  Top Layer w6: v1(318,2813) 603,2813 607,2817 v1(610,2814)
  Bottom Layer w6: v1(318,2813) 315,2816 315,3374.09 338,3397.09 338,3455.03 367.93,3484.96 367.93,3584.79 354.62,3598.1 354.62,3823.62 548,4017 R25.1@563,4017 ; v1(610,2814) 747,2814 794,2861 794,2915 C46.1@825,2946 825,2987.59 U2.7@789.74,3022.85
NetC47_1: C47.1 R26.1 U2.8 | length 98.7
  Bottom Layer w6: U2.8@764.15,2997.26 764.15,2944.15 C47.1@764,2944 764,2900 R26.1@765,2899
NetC50_1: C50.1 R38.2 R39.1 U5.7 U5.8 | length 842.6
  Top Layer w10: v1(573,4825) 965,4825 v1(991,4851)
  Bottom Layer w10: R38.2@543,4844 554,4844 v1(573,4825) ; R39.1@851,4681 v1(851,4826) ; v1(991,4851) 1001.45,4861.45 C50.1@1033,4861.45 ; U5.8@1032,4931.76 1033,4930.76 C50.1@1033,4861.45 ; U5.7@1082,4931.76 1082,4876 1068,4862 1040,4862 1037,4865 C50.1@1033,4861 C50.1@1033,4861.45
NetC53_1: C53.1 U4.11 | length 66.6
  Bottom Layer w10: U4.11@1109.91,2664.47 1109.91,2629.09 C53.1@1132,2607
NetJ1_2: J1.2 R7.1 | length 946.4
  Bottom Layer w6: J1.2@782,1057.48 816.48,1057.48 846,1087 846,1287 948.69,1389.69 948.69,1656.69 955,1663 R7.1@955,1912
NetJ1_3: J1.3 R9.1 | length 1047.8
  Bottom Layer w6: J1.3@782,978.74 824.74,978.74 861,1015 861,1285.03 961,1385.03 961,1646.97 998,1683.97 R9.1@998,1912
NetJ1_4: J1.4 R11.1 | length 1135.7
  Bottom Layer w6: J1.4@782,900 810,900 874,964 874,1268 974.69,1368.69 974.69,1643.69 1041,1710 R11.1@1041,1912
NetJ1_5: J1.5 R13.1 | length 1312.8
  Bottom Layer w6: J1.5@782,821.26 868.26,821.26 887,840 887,1247.97 1140,1500.97 1140,1856 R13.1@1084,1912
NetJ1_6: J1.6 R14.1 | length 1386
  Bottom Layer w6: J1.6@782,742.52 872.26,742.52 899,769.26 899,1243 1152,1496 1152,1887 R14.1@1127,1912
NetL2_1: L2.1 U3.56 | length 105.8
  Bottom Layer w10: U3.56@979.41,4331.7 979.41,4368.41
  Bottom Layer w20: 979.41,4368.41 979.41,4387.2 L2.1@1015,4422.79
NetL3_2: L3.2 Q2.1 | length 242.1
  Bottom Layer w30: L3.2@465,2064 465,1995 521.4,1938.6 Q2.1@521.4,1845.24
NetLD1_1: LD1.1 R1.1 | length 262.3
  Bottom Layer w20: LD1.1@830,4903 889,4844 889,4692 R1.1@908,4673
NetLD1_2: LD1.2 Q1.3 | length 480.4
  Top Layer w20: v2(385,4721) 573,4903 LD1.2@730,4903
  Bottom Layer w20: Q1.3@385,4659.24 v2(385,4721)
NetQ1_1: Q1.1 R37.1 | length 298
  Bottom Layer w6: Q1.1@425.4,4563 449,4563 R37.1@643,4369
NetR4_2: R4.2 U3.6 | length 123.3
  Bottom Layer w10: U3.6@1005,4207.69 1044.69,4207.69 1096,4259 R4.2@1107,4259
NetR6_1: R6.1 SDA.1 | length 121.8
  Bottom Layer w6: SDA.1@768,3456 768,3412 R6.1@823,3357
NetR8_1: R8.1 SCL.1 | length 82.4
  Bottom Layer w6: R8.1@991,3368 991,3432 SCL.1@1004,3445
NetR10_2: R10.2 TX.1 | length 85.6
  Bottom Layer w6: R10.2@910,3858 910,3788 TX.1@921,3777
NetR12_2: R12.2 RX.1 | length 101.7
  Bottom Layer w6: RX.1@849,3760 858,3769 R12.2@858,3858
NetR16_2: R16.2 R33.2 U4.4 | length 85.9
  Bottom Layer w8: R33.2@967,2686 R16.2@967,2727 970.47,2723.53 U4.4@1010.46,2723.53
NetR18_1: R18.1 U2.27 | length 118.6
  Bottom Layer w6: U2.27@746.43,3154.74 746.43,3200.43 R18.1@798,3252
NetR19_1: R19.1 U2.28 | length 78.5
  Bottom Layer w6: U2.28@764.15,3154.74 764.15,3191.15 784,3211 R19.1@798,3211